# EAGLE board weblight_developer (EAGLE 7.4.0)
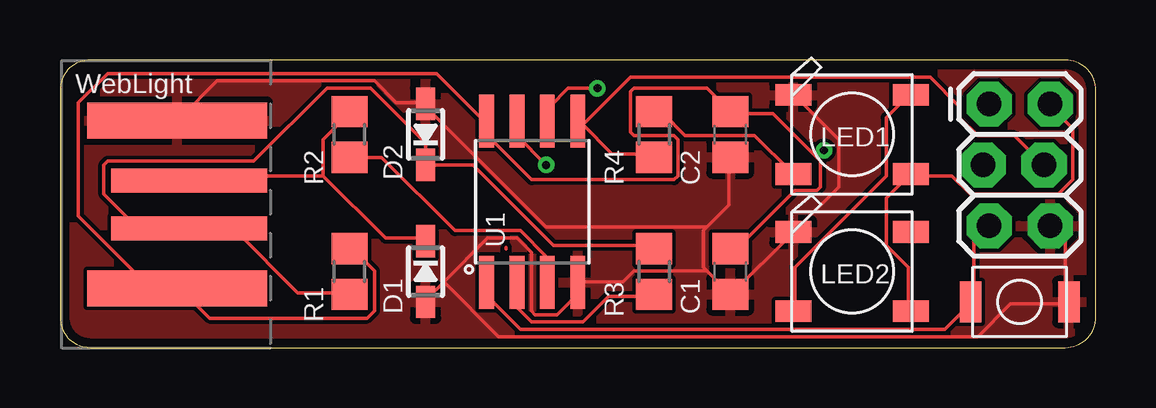
[diagram p0: board, top side]
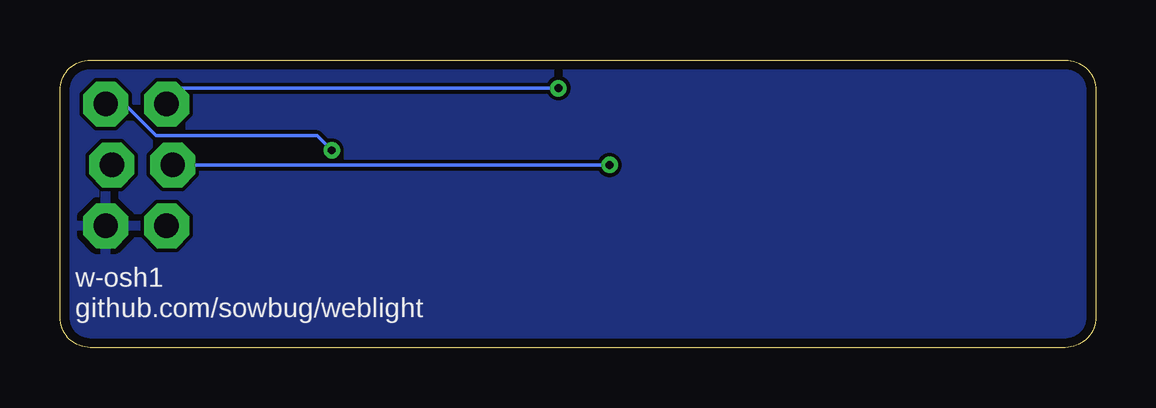
[diagram p1: board, bottom side, seen from below]

Size 43.18 x 12 mm. Coordinates in mm from the lower left corner, seen from the top.
Outline: 0,10.73 0,1.27 arc90 1.27,0 41.91,0 arc90 43.18,1.27 43.18,10.73 arc90 41.91,12 1.27,12 arc90 0,10.73
Copper layers (1*16): Top 0.0356mm / dielectric 1.5011mm / Bottom 0.0356mm
Design rules "LaenPCBOrder": minimum track width 6mil, minimum drill 13mil, track to track 6mil, track to pad 6mil, pad to pad 6mil, via to via 6mil, smd to smd 6mil, copper to edge 15mil, drill to drill 6mil, minimum pad ring 7mil, minimum via ring 7mil, stop-mask expansion 3mil, vias tented up to drill 0mil, thermal gap 10mil
vRestrict: area 0,0 to 9.5,12.1; area 24.8,1.3 to 42.5,3.2

## Footprints (pad centres in the part's own frame; a part is rotated, then mirrored left to right if it is on the bottom)
C0805 = smd 1.3 x 1.5: 1 -0.95,0; 2 0.95,0
SOD-323 = smd 1.35 x 0.8: A 1.27,0; C -1.27,0
2X3_LOCK = drill 1.016 pad 1.88 octagon: 1 0,0; 2 0,2.54; 3 2.54,-0.254; 4 2.54,2.286; 5 5.08,0; 6 5.08,2.54
USB-A-PCB = smd 7.5 x 1.5: 5V -0.2,-3.5; GND -0.2,3.5 | smd 6.5 x 1: USB_M 0.3,-1; USB_P 0.3,1
WS2812B = smd 1.5 x 0.9: 1-VDD 2.45,-1.65; 2-DOUT 2.45,1.65; 3-GND -2.45,1.65; 4-DIN -2.45,-1.65
R0805 = smd 1.3 x 1.5: 1 -0.95,0; 2 0.95,0
BUTTON_TD-85XU = smd 0.9 x 1.7: PAD1 -2.05,0; PAD2 2.05,0
SO08-EIAJ = smd 0.61 x 2.21: 1 -1.905,-3.378; 2 -0.635,-3.378; 3 0.635,-3.378; 4 1.905,-3.378; 5 1.905,3.353; 6 0.635,3.353; 7 -0.635,3.353; 8 -1.905,3.353

## Placement (x,y rotation side)
C1  10uF  [C0805]  27.94,3.17 270 top
C2  0.1uF  [C0805]  27.94,8.89 270 top
D1  3.6V  [SOD-323]  15.24,3.17 270 top
D2  3.6V  [SOD-323]  15.24,8.89 90 top
JP1  AVR_SPI_PRG_62X3_LOCK  [2X3_LOCK]  38.73,10.16 270 top
JP-USB-TOP  USBPCB  [USB-A-PCB]  5.08,5.97 0 top
LED1  WS2812B  [WS2812B]  33.02,8.89 0 top
LED2  WS2812B  [WS2812B]  33.02,3.17 0 top
R1  1.5K  [R0805]  12.06,3.17 270 top
R2  68  [R0805]  12.06,8.89 270 top
R3  68  [R0805]  24.77,3.17 90 top
R4  470  [R0805]  24.77,8.89 90 top
SW_RESET  BUTTON_TD-85XU  [BUTTON_TD-85XU]  40.01,1.91 0 top
U1  ATTiny85-20SU  [SO08-EIAJ]  19.68,6.1 0 top

## Library data of the parts
C1 C2 R1-R4 = rcl
D1 D2 = microbuilder
JP1 JP-USB-TOP = SparkFun-Connectors
LED1 LED2 SW_RESET = weblight
U1 = SparkFun-DigitalIC; PROD_ID: IC-09092

## Nets
DIN_1: LED1.4-DIN R4.2
DIN_2: LED1.2-DOUT LED2.4-DIN
GND: C1.2 C2.2 D1.A D2.A JP1.6 JP-USB-TOP.GND LED1.3-GND LED2.3-GND SW_RESET.PAD2 U1.4
MISO: JP1.1 U1.6
MOSI/DIN_RAW: JP1.4 R4.1 U1.5
N$4: JP1.3 U1.7
RESET: JP1.5 SW_RESET.PAD1 U1.1
USB_D_MINUS: R3.1 U1.2
USB_D_MINUS_RAW: D2.C JP-USB-TOP.USB_M R1.2 R3.2
USB_D_PLUS: R2.2 U1.3
USB_D_PLUS_RAW: D1.C JP-USB-TOP.USB_P R2.1
VCC: C1.1 C2.1 JP1.2 JP-USB-TOP.5V LED1.1-VDD LED2.1-VDD R1.1 U1.8

## Tracks (layer width: path | path; a pad name or v marks a point on that pad's centre or on a via)
DIN_1
  Top 0.152: LED1.4-DIN 30.48,7.32 28.96,8.84 26.06,8.84 25.15,9.75 24.84,9.75 R4.2
DIN_2
  Top 0.152: LED2.4-DIN 30.63,1.68 30.63,3.35 34.44,7.16 34.44,9.6 35.36,10.52 LED1.2-DOUT
GND
  Top 0.152: JP-USB-TOP.GND 5.03,9.6 6.55,11.12 13.11,11.12 14.02,10.21 15.24,10.21 D2.A 15.24,10.06 20.27,5.03 26.98,5.03 | JP1.6 41.3,5.03 41.91,4.42 41.91,1.98 SW_RESET.PAD2 41.91,1.83 39.62,1.83 38.25,0.46 18.29,0.46 16,2.74 | 16,2.74 17.83,4.57 19.05,4.57 19.66,3.96 19.66,1.52 19.81,1.37 20.73,1.37 21.49,2.13 21.49,2.59 U1.4 21.64,2.74 23.47,2.74 23.93,3.2 26.98,3.2 | 16,2.74 15.24,1.98 D1.A | 26.98,5.03 26.82,4.88 26.82,3.35 26.98,3.2 | 26.98,5.03 27.89,5.94 27.89,7.92 C2.2 | 26.98,3.2 27.89,2.29 C1.2 28.04,2.29 30.48,4.72 LED2.3-GND 30.63,4.88 32.46,6.71 32.46,8.69 30.63,10.52 LED1.3-GND
  pour Top: -1.91,13.34 44.45,13.34 44.45,-1.27 -1.91,-1.27
  pour Bottom: 0,12.7 43.81,12.7 43.81,-0.64 -1.27,-0.64 -1.27,12.7
MISO  (via drill 0.33)
  Top 0.152: v22.4,10.82 21.18,10.82 20.42,10.06 20.42,9.45 U1.6
  Bottom 0.152: v22.4,10.82 38.1,10.82 38.71,10.21 JP1.1
MOSI/DIN_RAW
  Top 0.152: 21.79,9.3 21.64,9.45 U1.5 21.79,9.3 | 21.79,9.3 23.01,8.08 24.69,8.08 R4.1 | 21.79,9.3 23.77,11.28 36.27,11.28 37.49,10.06 37.49,9.6 38.25,8.84 39.78,8.84 41,7.62 JP1.4
N$2
  Top 0.152: 18.59,4.12 18.6,4.18 18.59,4.12
N$4  (via drill 0.33)
  Top 0.152: U1.7 19.05,8.84 v20.27,7.62
  Bottom 0.152: v20.27,7.62 38.41,7.62 JP1.3
RESET
  Top 0.152: JP1.5 38.71,5.03 38.1,4.42 38.1,1.98 SW_RESET.PAD1 37.95,1.83 36.88,0.76 19.2,0.76 17.83,2.13 17.83,2.59 U1.1
USB_D_MINUS
  Top 0.152: R3.1 24.69,2.13 22.86,2.13 21.79,1.07 19.66,1.07 19.05,1.68 19.05,2.59 U1.2
USB_D_MINUS_RAW
  Top 0.152: R3.2 24.69,4.27 20.57,4.27 17.22,7.62 D2.C 15.24,8.53 12.95,10.82 11.12,10.82 8.08,7.77 1.98,7.77 1.83,7.62 1.83,6.4 3.2,5.03 5.33,5.03 JP-USB-TOP.USB_M 5.49,4.88 7.32,4.88 9.91,2.29 12.04,2.29 R1.2
USB_D_PLUS
  Top 0.152: R2.2 12.19,7.92 13.41,7.92 16.46,4.88 19.2,4.88 20.27,3.81 20.27,2.74 U1.3
USB_D_PLUS_RAW
  Top 0.152: 10.97,7.16 13.56,4.57 15.24,4.57 D1.C | 10.97,7.16 10.97,8.69 12.04,9.75 R2.1 | 10.97,7.16 5.64,7.16 5.49,7.01 JP-USB-TOP.USB_P
VCC  (via drill 0.33)
  Top 0.152: R1.1 12.19,4.12 13.11,3.2 13.11,1.52 12.8,1.22 6.25,1.22 5.03,2.44 JP-USB-TOP.5V 4.88,2.59 3.66,2.59 0.76,5.49 0.76,10.21 1.98,11.43 15.7,11.43 17.68,9.45 U1.8 17.83,9.45 17.83,8.84 19.66,7.01 25.6,7.01 25.76,7.16 25.76,8.69 25.6,8.84 23.93,8.84 23.77,8.99 23.77,10.67 23.93,10.82 26.98,10.82 27.89,9.91 C2.1 28.04,9.75 29.72,9.75 31.55,7.92 | LED2.1-VDD 35.36,1.68 35.36,3.35 34.44,4.27 34.44,6.25 35.36,7.16 LED1.1-VDD 35.51,7.16 37.19,7.16 37.95,6.4 41.6,6.4 42.22,7.01 42.22,9.14 41.3,10.06 JP1.2 | 31.55,7.92 31.7,7.77 31.7,6.71 31.55,6.55 30.63,6.55 28.35,4.27 28.04,4.27 C1.1 | 31.55,7.92 v31.85,8.23
  Bottom 0.152: v31.85,8.23 32.46,8.84 39.17,8.84 40.39,10.06 41.15,10.06 JP1.2

## Text on the board
tPlace: WebLight
bPlace: w-osh1 | github.com/sowbug/weblight